# Altium PCB 00.Main.PcbDoc (part 3 of 5)
Units mm, origin at the board's own origin, x right, y up, seen from the top; angles counter-clockwise.
Board outline 300 x 165 mm, 2 copper layers (Top Layer, Bottom Layer); 76 components, 103 nets, 576 pads, 97 vias.
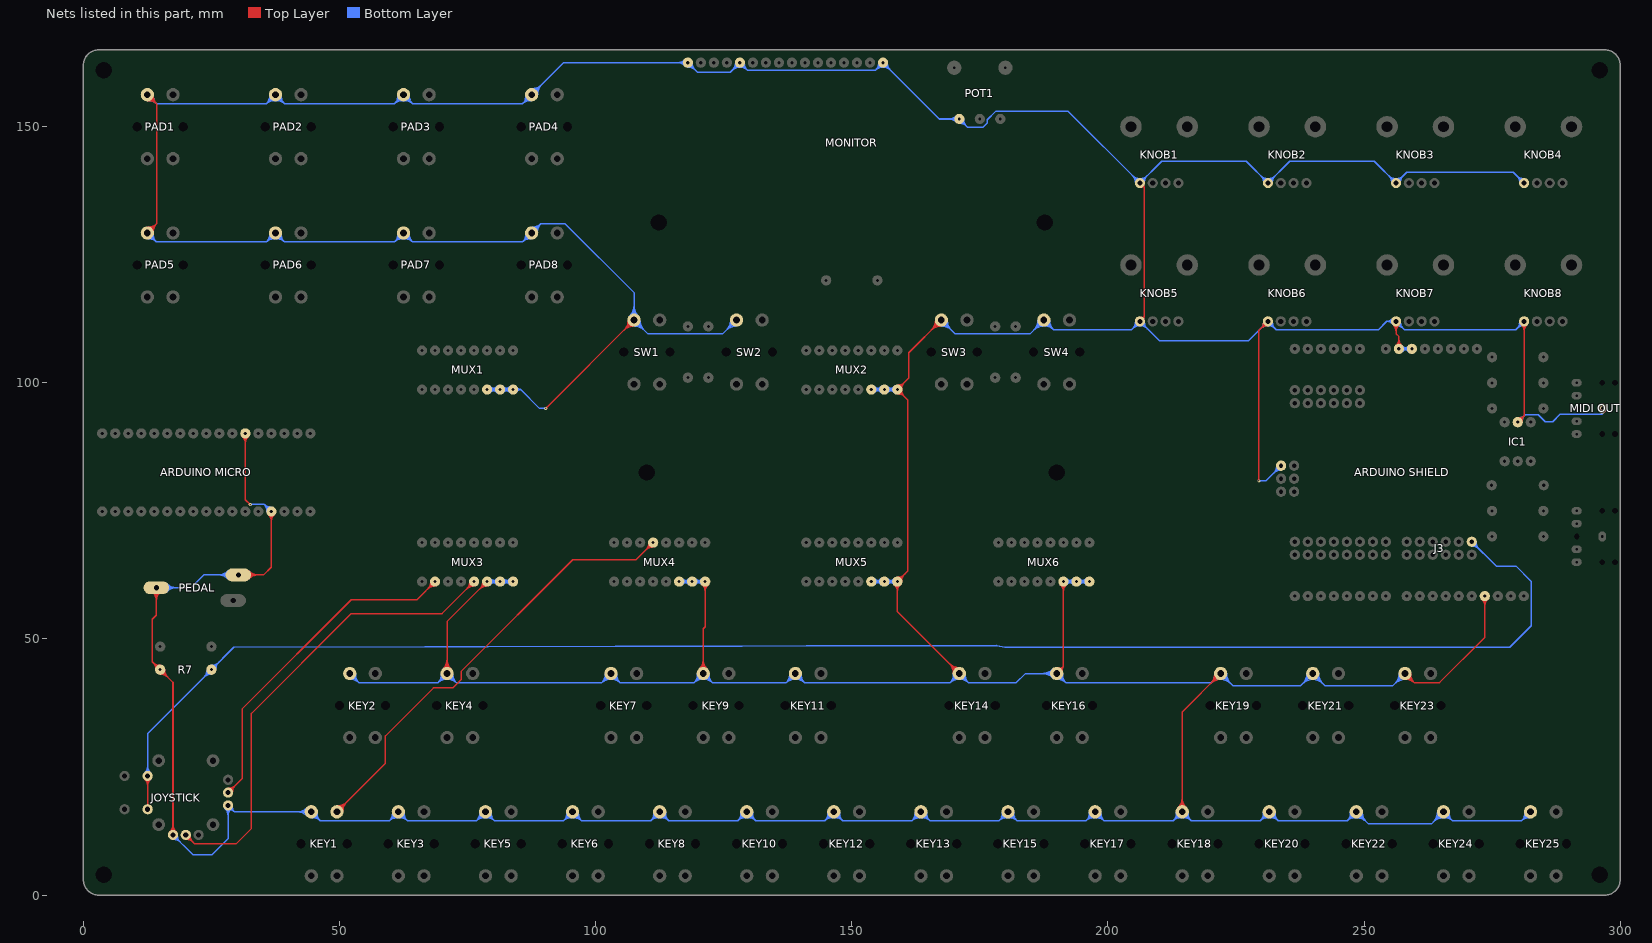
[diagram p3: the nets of this part, all layers, seen from the top]

## Via types
v1: diameter 0.6, hole 0.3, Top Layer to Bottom Layer, 97 vias

## Nets (pads, with @x,y where several pads share a name; then routed paths per layer and width w, separated by ;. In a path a pad name is that pad's centre, name@x,y a point inside that pad or via, vN(x,y) a via of type N, cw(c..) or ccw(c..) an arc to the next point about the centre after c; other vN are vias at no path point) (continued)
GND: "ARDUINO MICRO.14" "ARDUINO MICRO.23" "ARDUINO SHIELD.6" "ARDUINO SHIELD.6\"" "ARDUINO SHIELD.7" "ARDUINO SHIELD.29" "MIDI OUT.1" IC1.5 JOYSTICK.1X JOYSTICK.1Y KEY1.1 KEY2.1 KEY3.1 KEY4.1 KEY5.1 KEY6.1 KEY7.1 KEY8.1 KEY9.1 KEY10.1 KEY11.1 KEY12.1 KEY13.1 KEY14.1 KEY15.1 KEY16.1 KEY17.1 KEY18.1 KEY19.1 KEY20.1 KEY21.1 KEY22.1 KEY23.1 KEY24.1 KEY25.1 KNOB1.1 KNOB2.1 KNOB3.1 KNOB4.1 KNOB5.1 KNOB6.1 KNOB7.1 KNOB8.1 MONITOR.1 MONITOR.5 MONITOR.16 MUX1.6 MUX1.7 MUX1.8 MUX2.6 MUX2.7 MUX2.8 MUX3.6 MUX3.7 MUX3.8 MUX4.6 MUX4.7 MUX4.8 MUX5.6 MUX5.7 MUX5.8 MUX6.6 MUX6.7 MUX6.8 PAD1.1 PAD2.1 PAD3.1 PAD4.1 PAD5.1 PAD6.1 PAD7.1 PAD8.1 PEDAL.1 PEDAL.4 POT1.1 R7.2 SW1.1 SW2.1 SW3.1 SW4.1 | length 2593.4
  Top Layer w0.3: PAD5.1@12.5,129.25 14.362,131.112 ; PAD1.1@12.5,156.25 14.362,154.388 ; PAD5.1@12.532,130.099 ccw(c12.601,131.901) 13.876,130.626 ccw(c15.151,129.351) PAD5.1@13.349,129.282 ; PAD1.1@12.532,155.401 cw(c12.601,153.599) 13.876,154.874 cw(c15.151,156.149) PAD1.1@13.349,156.218 ; PAD5.1@12.544,130.399 ccw(c12.637,132.837) 14.362,131.112 ; PAD1.1@12.544,155.101 cw(c12.637,152.663) 14.362,154.388 ; PEDAL.1@13.472,59.222 cw(c11.594,57.344) 14.25,57.344 cw(c16.906,57.344) PEDAL.1@15.028,59.222 ; PAD5.1@13.649,129.294 cw(c16.087,129.387) 14.362,131.112 ; PAD1.1@13.649,156.206 ccw(c16.087,156.113) 14.362,154.388 ; PEDAL.1@13.684,59.434 cw(c12.319,58.069) 14.25,58.069 cw(c16.181,58.069) PEDAL.1@14.816,59.434 ; R7.2@14.15,44 ccw(c12.098,44) 13.549,45.451 ccw(c15,46.902) R7.2@15,44.85 ; PEDAL.1@14.25,60 14.25,54.636 13.448,53.834 13.448,45.552 R7.2@15,44 17.5,41.5 JOYSTICK.1X@17.5,11.75 ; R7.2@14.45,44 ccw(c13.122,44) 14.061,44.939 ccw(c15,45.878) R7.2@15,44.55 ; R7.2@15,43.15 cw(c15,41.098) 16.451,42.549 cw(c17.902,44) R7.2@15.85,44 ; R7.2@15,43.45 cw(c15,42.122) 15.939,43.061 cw(c16.878,44) R7.2@15.55,44 ; JOYSTICK.1X@16.899,12.351 ccw(c15.448,13.802) 17.5,13.802 ccw(c19.552,13.802) JOYSTICK.1X@18.101,12.351 ; JOYSTICK.1X@17.111,12.139 ccw(c16.172,13.078) 17.5,13.078 ccw(c18.828,13.078) JOYSTICK.1X@17.889,12.139 ; PEDAL.4@30.25,62.5 35.19,62.5 36.7,64.01 36.7,74.88 ; 31.019,89.519 cw(c29.568,88.068) 31.62,88.068 cw(c33.672,88.068) 32.221,89.519 ; 31.231,89.731 cw(c30.292,88.792) 31.62,88.792 cw(c32.948,88.792) 32.009,89.731 ; 31.62,90.12 31.62,77.191 v1(32.574,76.237) ; PEDAL.4@32.066,61.934 cw(c33.431,60.569) 33.431,62.5 cw(c33.431,64.431) PEDAL.4@32.066,63.066 ; PEDAL.4@32.278,61.722 cw(c34.156,59.844) 34.156,62.5 cw(c34.156,65.156) PEDAL.4@32.278,63.278 ; v1@32.424,76.237 ccw(c32.062,76.237) 32.318,76.493 ccw(c32.574,76.749) v1@32.574,76.387 ; 36.099,74.279 cw(c34.648,72.828) 36.7,72.828 cw(c38.752,72.828) 37.301,74.279 ; 36.311,74.491 cw(c35.372,73.552) 36.7,73.552 cw(c38.028,73.552) 37.089,74.491 ; KEY4.1@70.187,44.063 ccw(c68.224,46.026) 71,46.026 ccw(c73.776,46.026) KEY4.1@71.813,44.063 ; KEY4.1@70.399,43.851 ccw(c68.948,45.302) 71,45.302 ccw(c73.052,45.302) KEY4.1@71.601,43.851 ; KEY4.1@70.611,43.639 ccw(c69.672,44.578) 71,44.578 ccw(c72.328,44.578) KEY4.1@71.389,43.639 ; KEY4.1@71,43.25 71,53.38 MUX3.6@78.81,61.19 ; MUX3.6@77.96,61.19 cw(c75.908,61.19) 77.359,59.739 cw(c78.81,58.288) MUX3.6@78.81,60.34 ; MUX3.6@78.26,61.19 cw(c76.932,61.19) 77.871,60.251 cw(c78.81,59.312) MUX3.6@78.81,60.64 ; v1(90.257,95.007) SW1.1@107.5,112.25 ; v1@90.257,95.157 ccw(c90.257,95.52) 90.513,95.263 ccw(c90.77,95.007) v1@90.407,95.007 ; SW1.1@106.35,112.25 cw(c103.574,112.25) 105.537,110.287 cw(c107.5,108.324) SW1.1@107.5,111.1 ; SW1.1@106.65,112.25 cw(c104.598,112.25) 106.049,110.799 cw(c107.5,109.348) SW1.1@107.5,111.4 ; SW1.1@106.95,112.25 cw(c105.622,112.25) 106.561,111.311 cw(c107.5,110.372) SW1.1@107.5,111.7 ; KEY9.1@120.187,44.063 ccw(c118.224,46.026) 121,46.026 ccw(c123.776,46.026) KEY9.1@121.813,44.063 ; KEY9.1@120.399,43.851 ccw(c118.948,45.302) 121,45.302 ccw(c123.052,45.302) KEY9.1@121.601,43.851 ; KEY9.1@120.611,43.639 ccw(c119.672,44.578) 121,44.578 ccw(c122.328,44.578) KEY9.1@121.389,43.639 ; MUX4.8@120.789,60.589 cw(c119.338,59.138) 121.39,59.138 cw(c123.442,59.138) MUX4.8@121.991,60.589 ; KEY9.1@121,43.25 121,52.005 121.39,52.395 MUX4.8@121.39,61.19 ; MUX4.8@121.001,60.801 cw(c120.062,59.862) 121.39,59.862 cw(c122.718,59.862) MUX4.8@121.779,60.801 ; MUX5.8@158.289,60.589 cw(c156.838,59.138) 158.89,59.138 cw(c160.942,59.138) MUX5.8@159.491,60.589 ; MUX5.8@158.501,60.801 cw(c157.562,59.862) 158.89,59.862 cw(c160.218,59.862) MUX5.8@159.279,60.801 ; MUX5.8@158.89,61.74 ccw(c158.89,63.068) 159.829,62.129 ccw(c160.768,61.19) MUX5.8@159.44,61.19 ; MUX5.8@158.89,62.04 ccw(c158.89,64.092) 160.341,62.641 ccw(c161.792,61.19) MUX5.8@159.74,61.19 ; MUX2.8@158.89,97.84 cw(c158.89,95.788) 160.341,97.239 cw(c161.792,98.69) 159.74,98.69 cw(c161.792,98.69) 160.341,100.141 cw(c158.89,101.592) MUX2.8@158.89,99.54 ; MUX2.8@158.89,98.14 cw(c158.89,96.812) 159.829,97.751 cw(c160.768,98.69) 159.44,98.69 cw(c160.768,98.69) 159.829,99.629 cw(c158.89,100.568) MUX2.8@158.89,99.24 ; SW3.1@166.35,112.25 cw(c163.574,112.25) 165.537,110.287 cw(c167.5,108.324) SW3.1@167.5,111.1 ; SW3.1@166.65,112.25 cw(c164.598,112.25) 166.049,110.799 cw(c167.5,109.348) SW3.1@167.5,111.4 ; SW3.1@166.95,112.25 cw(c165.622,112.25) 166.561,111.311 cw(c167.5,110.372) SW3.1@167.5,111.7 ; SW3.1@167.5,112.25 161.133,105.883 161.133,100.933 MUX2.8@158.89,98.69 160.94,96.64 160.94,63.24 MUX5.8@158.89,61.19 158.89,55.36 KEY14.1@171,43.25 ; KEY14.1@169.85,43.25 ccw(c167.074,43.25) 169.037,45.213 ccw(c171,47.176) KEY14.1@171,44.4 ; KEY14.1@170.15,43.25 ccw(c168.098,43.25) 169.549,44.701 ccw(c171,46.152) KEY14.1@171,44.1 ; KEY14.1@170.45,43.25 ccw(c169.122,43.25) 170.061,44.189 ccw(c171,45.128) KEY14.1@171,43.8 ; KEY16.1@190,43.25 191.31,44.56 ; KEY16.1@190.272,44.055 ccw(c190.489,44.698) 190.968,44.218 ccw(c191.448,43.739) KEY16.1@190.805,43.522 ; KEY16.1@190.368,44.34 ccw(c190.661,45.208) 191.31,44.56 ; MUX6.6@190.709,60.589 cw(c189.258,59.138) 191.31,59.138 cw(c193.362,59.138) MUX6.6@191.911,60.589 ; MUX6.6@190.921,60.801 cw(c189.982,59.862) 191.31,59.862 cw(c192.638,59.862) MUX6.6@191.699,60.801 ; KEY16.1@191.09,43.618 cw(c191.958,43.911) 191.31,44.56 ; MUX6.6@191.31,61.19 191.31,44.56 ; KNOB5.1@206.25,112 207.072,112.822 ; KNOB1.1@206.25,139 207.072,138.178 ; KNOB5.1@206.641,112.755 ccw(c206.811,113.083) 207.072,112.822 ; KNOB1.1@206.641,138.245 cw(c206.811,137.917) 207.072,138.178 ; KNOB5.1@207.005,112.391 cw(c207.333,112.561) 207.072,112.822 ; KNOB1.1@207.005,138.609 ccw(c207.333,138.439) 207.072,138.178 ; KEY18.1@213.687,17.063 ccw(c211.724,19.026) 214.5,19.026 ccw(c217.276,19.026) KEY18.1@215.313,17.063 ; KEY18.1@213.899,16.851 ccw(c212.448,18.302) 214.5,18.302 ccw(c216.552,18.302) KEY18.1@215.101,16.851 ; KEY18.1@214.111,16.639 ccw(c213.172,17.578) 214.5,17.578 ccw(c215.828,17.578) KEY18.1@214.889,16.639 ; KEY18.1@214.5,16.25 214.5,35.75 KEY19.1@222,43.25 ; KEY19.1@220.85,43.25 cw(c218.074,43.25) 220.037,41.287 cw(c222,39.324) KEY19.1@222,42.1 ; KEY19.1@221.15,43.25 cw(c219.098,43.25) 220.549,41.799 cw(c222,40.348) KEY19.1@222,42.4 ; KEY19.1@221.45,43.25 cw(c220.122,43.25) 221.061,42.311 cw(c222,41.372) KEY19.1@222,42.7 ; v1@229.369,80.964 ccw(c229.174,81.159) 229.449,81.159 ; 229.449,81.282 ccw(c229.898,81.282) v1@229.581,80.964 ; v1(229.475,80.858) 229.449,80.884 229.449,110.199 KNOB6.1@231.25,112 ; KNOB6.1@230.4,112 cw(c228.348,112) 229.799,110.549 cw(c231.25,109.098) KNOB6.1@231.25,111.15 ; KNOB6.1@230.7,112 cw(c229.372,112) 230.311,111.061 cw(c231.25,110.122) KNOB6.1@231.25,111.45 ; KNOB7.1@255.649,111.399 cw(c254.198,109.948) 256.25,109.948 cw(c258.302,109.948) KNOB7.1@256.851,111.399 ; KNOB7.1@255.861,111.611 cw(c254.922,110.672) 256.25,110.672 cw(c257.578,110.672) KNOB7.1@256.639,111.611 ; 256.207,107.231 ccw(c254.756,108.682) 256.808,108.682 ccw(c258.86,108.682) 257.409,107.231 ; KNOB7.1@256.25,112 256.25,109.586 256.808,109.028 256.808,106.63 ; 256.419,107.019 ccw(c255.48,107.958) 256.808,107.958 ccw(c258.136,107.958) 257.197,107.019 ; KEY23.1@258,43.25 259.76,41.49 ; KEY23.1@258.068,42.403 cw(c258.193,40.841) 259.301,41.949 cw(c260.409,43.057) KEY23.1@258.847,43.182 ; KEY23.1@258.092,42.104 cw(c258.262,39.991) 259.76,41.49 ; KEY23.1@259.146,43.158 ccw(c261.259,42.988) 259.76,41.49 ; 272.971,57.769 cw(c271.52,56.318) 273.572,56.318 cw(c275.624,56.318) 274.173,57.769 ; 273.183,57.981 cw(c272.244,57.042) 273.572,57.042 cw(c274.9,57.042) 273.961,57.981 ; 273.572,58.37 273.572,50.306 264.755,41.49 259.76,41.49 ; IC1.5@280,92.31 281.25,93.56 ; IC1.5@280.061,92.857 ccw(c280.162,93.765) 280.809,93.119 ccw(c281.455,92.472) IC1.5@280.547,92.371 ; IC1.5@280.094,93.155 ccw(c280.251,94.559) 281.25,93.56 ; KNOB8.1@280.649,111.399 cw(c279.198,109.948) 281.25,109.948 cw(c283.302,109.948) KNOB8.1@281.851,111.399 ; IC1.5@280.845,92.404 cw(c282.249,92.561) 281.25,93.56 ; KNOB8.1@280.861,111.611 cw(c279.922,110.672) 281.25,110.672 cw(c282.578,110.672) KNOB8.1@281.639,111.611 ; KNOB8.1@281.25,112 281.25,93.56 ; 14.362,131.112 14.362,154.388 ; 207.072,112.822 207.072,138.178
  Bottom Layer w0.3: PAD5.1@12.5,129.25 14.256,127.494 35.744,127.494 ; PAD1.1@12.5,156.25 14.256,154.494 ; PAD5.1@12.57,128.403 cw(c12.697,126.851) 13.798,127.952 cw(c14.899,129.053) PAD5.1@13.347,129.18 ; PAD1.1@12.57,155.403 cw(c12.697,153.852) 13.798,154.952 cw(c14.898,156.053) PAD1.1@13.347,156.18 ; PAD5.1@12.594,128.104 cw(c12.767,126.005) 14.256,127.494 cw(c15.745,128.983) PAD5.1@13.646,129.156 ; PAD1.1@12.594,155.104 cw(c12.767,153.005) 14.256,154.494 ; PAD1.1@13.646,156.156 ccw(c15.744,155.983) 14.256,154.494 ; PEDAL.1@14.25,60 20.991,60 23.491,62.5 PEDAL.4@30.25,62.5 ; PEDAL.1@16.066,59.434 cw(c17.431,58.069) 17.431,60 cw(c17.431,61.931) PEDAL.1@16.066,60.566 ; PEDAL.1@16.278,59.222 cw(c18.156,57.344) 18.156,60 cw(c18.156,62.656) PEDAL.1@16.278,60.778 ; JOYSTICK.1X@17.5,10.9 cw(c17.5,8.848) 18.951,10.299 cw(c20.402,11.75) JOYSTICK.1X@18.35,11.75 ; JOYSTICK.1X@17.5,11.2 cw(c17.5,9.872) 18.439,10.811 cw(c19.378,11.75) JOYSTICK.1X@18.05,11.75 ; JOYSTICK.1X@17.5,11.75 21.39,7.86 25.098,7.86 28.25,11.012 JOYSTICK.1Y@28.25,17.5 29.5,16.25 ; JOYSTICK.1Y@27.649,16.899 cw(c26.198,15.448) 28.25,15.448 cw(c30.302,15.448) JOYSTICK.1Y@28.851,16.899 ; JOYSTICK.1Y@27.861,17.111 cw(c26.922,16.172) 28.25,16.172 cw(c29.578,16.172) JOYSTICK.1Y@28.639,17.111 ; PEDAL.4@28.222,61.722 ccw(c26.344,59.844) 26.344,62.5 ccw(c26.344,65.156) PEDAL.4@28.222,63.278 ; JOYSTICK.1Y@28.311,16.953 cw(c28.412,16.045) 29.059,16.691 cw(c29.705,17.338) JOYSTICK.1Y@28.797,17.439 ; JOYSTICK.1Y@28.344,16.655 cw(c28.501,15.251) 29.5,16.25 ; PEDAL.4@28.434,61.934 ccw(c27.069,60.569) 27.069,62.5 ccw(c27.069,64.431) PEDAL.4@28.434,63.066 ; JOYSTICK.1Y@29.095,17.406 ccw(c30.499,17.249) 29.5,16.25 ; v1(32.574,76.237) 32.667,76.33 35.25,76.33 ; v1@32.68,76.131 cw(c33.161,75.65) 33.161,76.33 ; 35.85,74.88 ccw(c33.802,74.881) 35.25,76.33 ; 36.15,74.88 ccw(c34.825,74.881) 35.762,75.818 ccw(c36.699,76.755) 36.7,75.43 ; PAD6.1@36.354,129.156 cw(c34.255,128.983) 35.744,127.494 ; PAD2.1@36.354,156.156 cw(c34.255,155.983) 35.744,154.494 ; PAD6.1@36.653,129.18 cw(c35.101,129.053) 36.202,127.952 cw(c37.303,126.851) PAD6.1@37.43,128.403 ; PAD2.1@36.653,156.18 cw(c35.102,156.053) 36.202,154.952 cw(c37.303,153.852) PAD2.1@37.43,155.403 ; 36.7,74.88 35.25,76.33 ; 36.7,75.73 cw(c36.699,77.778) 35.25,76.33 ; PAD6.1@37.406,128.104 ccw(c37.233,126.005) 35.744,127.494 ; PAD2.1@37.406,155.104 ccw(c37.233,153.005) 35.744,154.494 ; PAD6.1@37.57,128.403 cw(c37.697,126.851) 38.798,127.952 cw(c39.899,129.053) PAD6.1@38.347,129.18 ; PAD2.1@37.57,155.403 cw(c37.697,153.852) 38.798,154.952 cw(c39.898,156.053) PAD2.1@38.347,156.18 ; PAD6.1@37.594,128.104 cw(c37.767,126.005) 39.256,127.494 cw(c40.745,128.983) PAD6.1@38.646,129.156 ; PAD2.1@37.594,155.104 cw(c37.767,153.005) 39.256,154.494 ; PAD2.1@38.646,156.156 ccw(c40.744,155.983) 39.256,154.494 ; KEY1.1@43.687,15.437 ccw(c41.724,13.474) 41.724,16.25 ccw(c41.724,19.026) KEY1.1@43.687,17.063 ; KEY1.1@43.899,15.649 ccw(c42.448,14.198) 42.448,16.25 ccw(c42.448,18.302) KEY1.1@43.899,16.851 ; KEY1.1@44.111,15.861 ccw(c43.172,14.922) 43.172,16.25 ccw(c43.172,17.578) KEY1.1@44.111,16.639 ; KEY1.1@44.568,15.403 cw(c44.693,13.841) 45.801,14.949 cw(c46.909,16.057) KEY1.1@45.347,16.182 ; KEY1.1@44.592,15.104 cw(c44.761,12.99) 46.261,14.489 ; KEY1.1@45.646,16.158 ccw(c47.76,15.989) 46.261,14.489 ; KEY2.1@52,43.25 53.76,41.49 ; KEY2.1@52.068,42.403 cw(c52.193,40.841) 53.301,41.949 cw(c54.409,43.057) KEY2.1@52.847,43.182 ; KEY2.1@52.092,42.104 cw(c52.262,39.991) 53.76,41.49 ; KEY2.1@53.146,43.158 ccw(c55.259,42.988) 53.76,41.49 ; KEY3.1@60.354,16.158 cw(c58.24,15.989) 59.739,14.489 ; KEY3.1@60.653,16.182 cw(c59.091,16.057) 60.199,14.949 cw(c61.307,13.841) KEY3.1@61.432,15.403 ; PAD7.1@61.354,129.156 cw(c59.255,128.983) 60.744,127.494 ; PAD3.1@61.354,156.156 cw(c59.255,155.983) 60.744,154.494 ; KEY3.1@61.408,15.104 ccw(c61.239,12.99) 59.739,14.489 ; KEY3.1@61.568,15.403 cw(c61.693,13.841) 62.801,14.949 cw(c63.909,16.057) KEY3.1@62.347,16.182 ; KEY3.1@61.592,15.104 cw(c61.761,12.99) 63.261,14.489 ; PAD7.1@61.653,129.18 cw(c60.101,129.053) 61.202,127.952 cw(c62.303,126.851) PAD7.1@62.43,128.403 ; PAD3.1@61.653,156.18 cw(c60.102,156.053) 61.202,154.952 cw(c62.303,153.852) PAD3.1@62.43,155.403 ; PAD7.1@62.406,128.104 ccw(c62.233,126.005) 60.744,127.494 ; PAD3.1@62.406,155.104 ccw(c62.233,153.005) 60.744,154.494 ; PAD7.1@62.57,128.403 cw(c62.697,126.851) 63.798,127.952 cw(c64.899,129.053) PAD7.1@63.347,129.18 ; PAD3.1@62.57,155.403 cw(c62.697,153.852) 63.798,154.952 cw(c64.898,156.053) PAD3.1@63.347,156.18 ; PAD7.1@62.594,128.104 cw(c62.767,126.005) 64.256,127.494 ; PAD3.1@62.594,155.104 cw(c62.767,153.005) 64.256,154.494 ; KEY3.1@62.646,16.158 ccw(c64.76,15.989) 63.261,14.489 ; PAD7.1@63.646,129.156 ccw(c65.745,128.983) 64.256,127.494 ; PAD3.1@63.646,156.156 ccw(c65.744,155.983) 64.256,154.494 ; KEY4.1@69.854,43.158 cw(c67.741,42.988) 69.24,41.49 ; KEY4.1@70.153,43.182 cw(c68.591,43.057) 69.699,41.949 cw(c70.807,40.841) KEY4.1@70.932,42.403 ; KEY4.1@70.908,42.104 ccw(c70.738,39.991) 69.24,41.49 ; KEY4.1@71.068,42.403 cw(c71.193,40.841) 72.301,41.949 cw(c73.409,43.057) KEY4.1@71.847,43.182 ; KEY4.1@71.092,42.104 cw(c71.262,39.991) 72.76,41.49 ; KEY4.1@72.146,43.158 ccw(c74.259,42.988) 72.76,41.49 ; KEY5.1@77.354,16.158 cw(c75.24,15.989) 76.739,14.489 ; KEY5.1@77.653,16.182 cw(c76.091,16.057) 77.199,14.949 cw(c78.307,13.841) KEY5.1@78.432,15.403 ; KEY5.1@78.408,15.104 ccw(c78.239,12.99) 76.739,14.489 ; KEY5.1@78.568,15.403 cw(c78.693,13.841) 79.801,14.949 cw(c80.909,16.057) KEY5.1@79.347,16.182 ; KEY5.1@78.592,15.104 cw(c78.761,12.99) 80.261,14.489 ; MUX3.6@78.81,61.19 MUX3.7@81.35,61.19 MUX3.8@83.89,61.19 ; MUX1.6@78.81,98.69 MUX1.7@81.35,98.69 MUX1.8@83.89,98.69 85.375,98.69 ; MUX3.6@79.199,60.801 cw(c80.138,59.862) 80.138,61.19 cw(c80.138,62.518) MUX3.6@79.199,61.579 ; MUX1.6@79.199,98.301 cw(c80.138,97.362) 80.138,98.69 cw(c80.138,100.018) MUX1.6@79.199,99.079 ; MUX3.6@79.411,60.589 cw(c80.862,59.138) 80.862,61.19 cw(c80.862,63.242) MUX3.6@79.411,61.791 ; MUX1.6@79.411,98.089 cw(c80.862,96.638) 80.862,98.69 cw(c80.862,100.742) MUX1.6@79.411,99.291 ; KEY5.1@79.646,16.158 ccw(c81.76,15.989) 80.261,14.489 ; MUX3.7@80.539,60.937 ccw(c79.865,60.726) 80.047,61.408 ccw(c80.183,61.914) MUX3.7@80.628,61.638 ; MUX3.7@80.539,61.443 cw(c79.865,61.654) 80.047,60.972 cw(c80.183,60.466) MUX3.7@80.628,60.742 ; MUX1.7@80.539,98.437 ccw(c79.865,98.226) 80.047,98.908 ccw(c80.183,99.414) MUX1.7@80.628,99.138 ; MUX1.7@80.539,98.943 cw(c79.865,99.154) 80.047,98.472 cw(c80.183,97.966) MUX1.7@80.628,98.242 ; MUX3.7@80.749,60.589 ccw(c79.298,59.138) 79.298,61.19 ccw(c79.298,63.242) MUX3.7@80.749,61.791 ; MUX1.7@80.749,98.089 ccw(c79.298,96.638) 79.298,98.69 ccw(c79.298,100.742) MUX1.7@80.749,99.291 ; MUX3.7@80.961,60.801 ccw(c80.022,59.862) 80.022,61.19 ccw(c80.022,62.518) MUX3.7@80.961,61.579 ; MUX1.7@80.961,98.301 ccw(c80.022,97.362) 80.022,98.69 ccw(c80.022,100.018) MUX1.7@80.961,99.079 ; MUX3.7@81.739,60.801 cw(c82.678,59.862) 82.678,61.19 cw(c82.678,62.518) MUX3.7@81.739,61.579 ; MUX1.7@81.739,98.301 cw(c82.678,97.362) 82.678,98.69 cw(c82.678,100.018) MUX1.7@81.739,99.079 ; MUX3.7@81.951,60.589 cw(c83.402,59.138) 83.402,61.19 cw(c83.402,63.242) MUX3.7@81.951,61.791 ; MUX1.7@81.951,98.089 cw(c83.402,96.638) 83.402,98.69 cw(c83.402,100.742) MUX1.7@81.951,99.291 ; MUX3.8@83.079,60.937 ccw(c82.405,60.726) 82.587,61.408 ccw(c82.723,61.914) MUX3.8@83.168,61.638 ; MUX3.8@83.079,61.443 cw(c82.405,61.654) 82.587,60.972 cw(c82.723,60.466) MUX3.8@83.168,60.742 ; MUX1.8@83.079,98.437 ccw(c82.405,98.226) 82.587,98.908 ccw(c82.723,99.414) MUX1.8@83.168,99.138 ; MUX1.8@83.079,98.943 cw(c82.405,99.154) 82.587,98.472 cw(c82.723,97.966) MUX1.8@83.168,98.242 ; MUX3.8@83.289,60.589 ccw(c81.838,59.138) 81.838,61.19 ccw(c81.838,63.242) MUX3.8@83.289,61.791 ; MUX1.8@83.289,98.089 ccw(c81.838,96.638) 81.838,98.69 ccw(c81.838,100.742) MUX1.8@83.289,99.291 ; MUX3.8@83.501,60.801 ccw(c82.562,59.862) 82.562,61.19 ccw(c82.562,62.518) MUX3.8@83.501,61.579 ; MUX1.8@83.501,98.301 ccw(c82.562,97.362) 82.562,98.69 ccw(c82.562,100.018) MUX1.8@83.501,99.079 ; MUX1.8@84.623,98.26 cw(c85.374,97.819) 85.374,98.69 ; MUX1.8@84.623,99.12 ccw(c85.374,99.561) 85.374,98.69 ; PAD8.1@86.354,129.156 cw(c84.255,128.983) 85.744,127.494 ; PAD4.1@86.354,156.156 cw(c84.255,155.983) 85.744,154.494 cw(c87.233,153.005) PAD4.1@87.406,155.104 ; PAD8.1@86.653,129.18 cw(c85.101,129.053) 86.202,127.952 cw(c87.303,126.851) PAD8.1@87.43,128.403 ; PAD4.1@86.653,156.18 cw(c85.102,156.053) 86.202,154.952 cw(c87.303,153.852) PAD4.1@87.43,155.403 ; PAD8.1@87.406,128.104 ccw(c87.233,126.005) 85.744,127.494 ; PAD4.1@87.5,156.8 ccw(c87.5,158.128) 88.439,157.189 ccw(c89.378,156.25) PAD4.1@88.05,156.25 ; PAD4.1@87.5,157.1 ccw(c87.5,159.152) 88.951,157.701 ccw(c90.402,156.25) PAD4.1@88.35,156.25 ; PAD4.1@87.5,157.4 ccw(c87.5,160.176) 89.463,158.213 ccw(c91.426,156.25) PAD4.1@88.65,156.25 ; PAD8.1@87.563,130.098 ccw(c87.681,131.692) 88.812,130.562 ccw(c89.942,129.431) PAD8.1@88.348,129.313 ; PAD8.1@87.585,130.397 ccw(c87.745,132.554) 89.275,131.025 ; PAD8.1@88.647,129.335 cw(c90.804,129.495) 89.275,131.025 ; v1@90.151,94.901 ccw(c89.895,94.645) 89.895,95.007 ccw(c89.895,95.37) v1@90.151,95.113 ; v1(90.257,95.007) 89.057,95.007 85.375,98.69 ; KEY6.1@94.354,16.158 cw(c92.24,15.989) 93.739,14.489 ; KEY6.1@94.653,16.182 cw(c93.091,16.057) 94.199,14.949 cw(c95.307,13.841) KEY6.1@95.432,15.403 ; KEY6.1@95.408,15.104 ccw(c95.239,12.99) 93.739,14.489 ; KEY6.1@95.568,15.403 cw(c95.693,13.841) 96.801,14.949 cw(c97.909,16.057) KEY6.1@96.347,16.182 ; KEY6.1@95.592,15.104 cw(c95.761,12.99) 97.261,14.489 cw(c98.76,15.989) KEY6.1@96.646,16.158 ; KEY7.1@101.854,43.158 cw(c99.741,42.988) 101.24,41.49 ; KEY7.1@102.153,43.182 cw(c100.591,43.057) 101.699,41.949 cw(c102.807,40.841) KEY7.1@102.932,42.403 ; KEY7.1@102.908,42.104 ccw(c102.738,39.991) 101.24,41.49 ; KEY7.1@103.068,42.403 cw(c103.193,40.841) 104.301,41.949 cw(c105.409,43.057) KEY7.1@103.847,43.182 ; KEY7.1@103.092,42.104 cw(c103.262,39.991) 104.76,41.49 ; KEY7.1@104.146,43.158 ccw(c106.259,42.988) 104.76,41.49 ; SW1.1@106.687,113.063 ccw(c104.724,115.026) 107.5,115.026 ccw(c110.276,115.026) SW1.1@108.313,113.063 ; SW1.1@106.899,112.851 ccw(c105.448,114.302) 107.5,114.302 ccw(c109.552,114.302) SW1.1@108.101,112.851 ; SW1.1@107.111,112.639 ccw(c106.172,113.578) 107.5,113.578 ccw(c108.828,113.578) SW1.1@107.889,112.639 ; SW1.1@107.5,111.1 cw(c107.5,108.324) 109.463,110.287 cw(c111.426,112.25) SW1.1@108.65,112.25 ; SW1.1@107.5,111.4 cw(c107.5,109.348) 108.951,110.799 cw(c110.402,112.25) SW1.1@108.35,112.25 ; SW1.1@107.5,111.7 cw(c107.5,110.372) 108.439,111.311 cw(c109.378,112.25) SW1.1@108.05,112.25 ; KEY8.1@111.354,16.158 cw(c109.24,15.989) 110.739,14.489 ; KEY8.1@111.653,16.182 cw(c110.091,16.057) 111.199,14.949 cw(c112.307,13.841) KEY8.1@112.432,15.403 ; KEY8.1@112.408,15.104 ccw(c112.239,12.99) 110.739,14.489 ; KEY8.1@112.568,15.403 cw(c112.693,13.841) 113.801,14.949 cw(c114.909,16.057) KEY8.1@113.347,16.182 ; KEY8.1@112.592,15.104 cw(c112.761,12.99) 114.261,14.489 ; KEY8.1@113.646,16.158 ccw(c115.76,15.989) 114.261,14.489 ; MUX4.6@116.31,61.19 MUX4.7@118.85,61.19 MUX4.8@121.39,61.19 ; MUX4.6@116.699,60.801 cw(c117.638,59.862) 117.638,61.19 cw(c117.638,62.518) MUX4.6@116.699,61.579 ; MUX4.6@116.911,60.589 cw(c118.362,59.138) 118.362,61.19 cw(c118.362,63.242) MUX4.6@116.911,61.791 ; MUX4.6@117.032,60.742 cw(c117.477,60.466) 117.613,60.972 cw(c117.795,61.654) MUX4.6@117.121,61.443 ; MUX4.6@117.032,61.638 ccw(c117.477,61.914) 117.613,61.408 ccw(c117.795,60.726) MUX4.6@117.121,60.937 ; MONITOR.1@117.399,161.899 ccw(c115.948,160.448) 115.948,162.5 ccw(c115.948,164.552) MONITOR.1@117.399,163.101 ; MONITOR.1@117.611,162.111 ccw(c116.672,161.172) 116.672,162.5 ccw(c116.672,163.828) MONITOR.1@117.611,162.889 ; MONITOR.1@118,161.65 cw(c118,159.598) 119.451,161.049 cw(c120.902,162.5) MONITOR.1@118.85,162.5 ; MONITOR.1@118,161.95 cw(c118,160.622) 118.939,161.561 ; MUX4.7@118.249,60.589 ccw(c116.798,59.138) 116.798,61.19 ccw(c116.798,63.242) MUX4.7@118.249,61.791 ; MUX4.7@118.461,60.801 ccw(c117.522,59.862) 117.522,61.19 ccw(c117.522,62.518) MUX4.7@118.461,61.579 ; MONITOR.1@118.55,162.5 ccw(c119.878,162.5) 118.939,161.561 ; MUX4.7@119.239,60.801 cw(c120.178,59.862) 120.178,61.19 cw(c120.178,62.518) MUX4.7@119.239,61.579 ; MUX4.7@119.451,60.589 cw(c120.902,59.138) 120.902,61.19 cw(c120.902,63.242) MUX4.7@119.451,61.791 ; MUX4.7@119.572,60.742 cw(c120.017,60.466) 120.153,60.972 cw(c120.335,61.654) MUX4.7@119.661,61.443 ; MUX4.7@119.572,61.638 ccw(c120.017,61.914) 120.153,61.408 ccw(c120.335,60.726) MUX4.7@119.661,60.937 ; KEY9.1@119.854,43.158 cw(c117.741,42.988) 119.24,41.49 ; KEY9.1@120.153,43.182 cw(c118.591,43.057) 119.699,41.949 cw(c120.807,40.841) KEY9.1@120.932,42.403 ; MUX4.8@120.789,60.589 ccw(c119.338,59.138) 119.338,61.19 ccw(c119.338,63.242) MUX4.8@120.789,61.791 ; KEY9.1@120.908,42.104 ccw(c120.738,39.991) 119.24,41.49 ; MUX4.8@121.001,60.801 ccw(c120.062,59.862) 120.062,61.19 ccw(c120.062,62.518) MUX4.8@121.001,61.579 ; KEY9.1@121.068,42.403 cw(c121.193,40.841) 122.301,41.949 cw(c123.409,43.057) KEY9.1@121.847,43.182 ; KEY9.1@121.092,42.104 cw(c121.262,39.991) 122.76,41.49 ; KEY9.1@122.146,43.158 ccw(c124.259,42.988) 122.76,41.49 ; SW2.1@126.35,112.25 cw(c123.574,112.25) 125.537,110.287 cw(c127.5,108.324) SW2.1@127.5,111.1 ; SW2.1@126.65,112.25 cw(c124.598,112.25) 126.049,110.799 cw(c127.5,109.348) SW2.1@127.5,111.4 ; SW2.1@126.95,112.25 cw(c125.622,112.25) 126.561,111.311 cw(c127.5,110.372) SW2.1@127.5,111.7 ; 127.221,161.561 cw(c128.16,160.622) 128.16,161.95 cw(c128.16,160.622) 129.099,161.561 ; 127.221,161.561 ccw(c126.282,162.5) MONITOR.5@127.61,162.5 ; MONITOR.5@127.31,162.5 cw(c125.258,162.5) 126.709,161.049 cw(c128.16,159.598) 128.16,161.65 cw(c128.16,159.598) 129.611,161.049 cw(c131.062,162.5) MONITOR.5@129.01,162.5 ; SW2.1@127.5,112.25 124.786,109.536 110.214,109.536 SW1.1@107.5,112.25 107.5,117.613 94.089,131.025 89.275,131.025 ; KEY10.1@128.354,16.158 cw(c126.24,15.989) 127.739,14.489 ; KEY10.1@128.653,16.182 cw(c127.091,16.057) 128.199,14.949 cw(c129.307,13.841) KEY10.1@129.432,15.403 ; MONITOR.5@128.71,162.5 ccw(c130.038,162.5) 129.099,161.561 ; KEY10.1@129.408,15.104 ccw(c129.239,12.99) 127.739,14.489 ; KEY10.1@129.568,15.403 cw(c129.693,13.841) 130.801,14.949 cw(c131.909,16.057) KEY10.1@130.347,16.182 ; KEY10.1@129.592,15.104 cw(c129.761,12.99) 131.261,14.489 ; KEY10.1@130.646,16.158 ccw(c132.76,15.989) 131.261,14.489 ; KEY11.1@137.854,43.158 cw(c135.741,42.988) 137.24,41.49 ; KEY11.1@138.153,43.182 cw(c136.591,43.057) 137.699,41.949 cw(c138.807,40.841) KEY11.1@138.932,42.403 ; KEY11.1@138.908,42.104 ccw(c138.738,39.991) 137.24,41.49 ; KEY11.1@139.068,42.403 cw(c139.193,40.841) 140.301,41.949 cw(c141.409,43.057) KEY11.1@139.847,43.182 ; KEY11.1@139.092,42.104 cw(c139.262,39.991) 140.76,41.49 ; KEY11.1@140.146,43.158 ccw(c142.259,42.988) 140.76,41.49 ; KEY12.1@145.354,16.158 cw(c143.24,15.989) 144.739,14.489 ; KEY12.1@145.653,16.182 cw(c144.091,16.057) 145.199,14.949 cw(c146.307,13.841) KEY12.1@146.432,15.403 ; KEY12.1@146.408,15.104 ccw(c146.239,12.99) 144.739,14.489 ; KEY12.1@146.568,15.403 cw(c146.693,13.841) 147.801,14.949 cw(c148.909,16.057) KEY12.1@147.347,16.182 ; KEY12.1@146.592,15.104 cw(c146.761,12.99) 148.261,14.489 ; KEY12.1@147.646,16.158 ccw(c149.76,15.989) 148.261,14.489 ; MUX5.6@153.81,61.19 MUX5.7@156.35,61.19 MUX5.8@158.89,61.19 ; MUX2.6@153.81,98.69 MUX2.7@156.35,98.69 MUX2.8@158.89,98.69 ; MUX5.6@154.199,60.801 cw(c155.138,59.862) 155.138,61.19 cw(c155.138,62.518) MUX5.6@154.199,61.579 ; MUX2.6@154.199,98.301 cw(c155.138,97.362) 155.138,98.69 cw(c155.138,100.018) MUX2.6@154.199,99.079 ; MUX5.6@154.411,60.589 cw(c155.862,59.138) 155.862,61.19 cw(c155.862,63.242) MUX5.6@154.411,61.791 ; MUX2.6@154.411,98.089 cw(c155.862,96.638) 155.862,98.69 cw(c155.862,100.742) MUX2.6@154.411,99.291 ; MUX2.6@154.532,98.242 cw(c154.977,97.966) 155.113,98.472 cw(c155.295,99.154) MUX2.6@154.621,98.943 ; MUX2.6@154.532,99.138 ccw(c154.977,99.414) 155.113,98.908 ccw(c155.295,98.226) MUX2.6@154.621,98.437 ; 155.161,161.561 cw(c156.1,160.622) 156.1,161.95 cw(c156.1,160.622) 157.039,161.561 ; 155.161,161.561 ccw(c154.222,162.5) MONITOR.16@155.55,162.5 ; MONITOR.16@155.25,162.5 cw(c153.198,162.5) 154.649,161.049 cw(c156.1,159.598) 156.1,161.65 cw(c156.1,159.598) 157.551,161.049 cw(c159.002,162.5) MONITOR.16@156.95,162.5 ; MUX5.7@155.539,60.937 ccw(c154.865,60.726) 155.047,61.408 ccw(c155.183,61.914) MUX5.7@155.628,61.638 ; MUX5.7@155.539,61.443 cw(c154.865,61.654) 155.047,60.972 cw(c155.183,60.466) MUX5.7@155.628,60.742 ; MUX5.7@155.749,60.589 ccw(c154.298,59.138) 154.298,61.19 ccw(c154.298,63.242) MUX5.7@155.749,61.791 ; MUX2.7@155.749,98.089 ccw(c154.298,96.638) 154.298,98.69 ccw(c154.298,100.742) MUX2.7@155.749,99.291 ; MUX5.7@155.961,60.801 ccw(c155.022,59.862) 155.022,61.19 ccw(c155.022,62.518) MUX5.7@155.961,61.579 ; MUX2.7@155.961,98.301 ccw(c155.022,97.362) 155.022,98.69 ccw(c155.022,100.018) MUX2.7@155.961,99.079 ; MONITOR.16@156.65,162.5 ccw(c157.978,162.5) 157.039,161.561 ; MUX5.7@156.739,60.801 cw(c157.678,59.862) 157.678,61.19 cw(c157.678,62.518) MUX5.7@156.739,61.579 ; MUX2.7@156.739,98.301 cw(c157.678,97.362) 157.678,98.69 cw(c157.678,100.018) MUX2.7@156.739,99.079 ; MUX5.7@156.951,60.589 cw(c158.402,59.138) 158.402,61.19 cw(c158.402,63.242) MUX5.7@156.951,61.791 ; MUX2.7@156.951,98.089 cw(c158.402,96.638) 158.402,98.69 cw(c158.402,100.742) MUX2.7@156.951,99.291 ; MUX2.7@157.072,98.242 cw(c157.517,97.966) 157.653,98.472 cw(c157.835,99.154) MUX2.7@157.161,98.943 ; MUX2.7@157.072,99.138 ccw(c157.517,99.414) 157.653,98.908 ccw(c157.835,98.226) MUX2.7@157.161,98.437 ; MUX5.8@158.079,60.937 ccw(c157.405,60.726) 157.587,61.408 ccw(c157.723,61.914) MUX5.8@158.168,61.638 ; MUX5.8@158.079,61.443 cw(c157.405,61.654) 157.587,60.972 cw(c157.723,60.466) MUX5.8@158.168,60.742 ; MUX5.8@158.289,60.589 ccw(c156.838,59.138) 156.838,61.19 ccw(c156.838,63.242) MUX5.8@158.289,61.791 ; MUX2.8@158.289,98.089 ccw(c156.838,96.638) 156.838,98.69 ccw(c156.838,100.742) MUX2.8@158.289,99.291 ; MUX5.8@158.501,60.801 ccw(c157.562,59.862) 157.562,61.19 ccw(c157.562,62.518) MUX5.8@158.501,61.579 ; MUX2.8@158.501,98.301 ccw(c157.562,97.362) 157.562,98.69 ccw(c157.562,100.018) MUX2.8@158.501,99.079 ; KEY13.1@162.354,16.158 cw(c160.24,15.989) 161.739,14.489 ; KEY13.1@162.653,16.182 cw(c161.091,16.057) 162.199,14.949 cw(c163.307,13.841) KEY13.1@163.432,15.403 ; KEY13.1@163.408,15.104 ccw(c163.239,12.99) 161.739,14.489 ; KEY13.1@163.568,15.403 cw(c163.693,13.841) 164.801,14.949 cw(c165.909,16.057) KEY13.1@164.347,16.182 ; KEY13.1@163.592,15.104 cw(c163.761,12.99) 165.261,14.489 ; KEY13.1@164.646,16.158 ccw(c166.76,15.989) 165.261,14.489 ; SW3.1@167.5,111.1 cw(c167.5,108.324) 169.463,110.287 cw(c171.426,112.25) SW3.1@168.65,112.25 ; SW3.1@167.5,111.4 cw(c167.5,109.348) 168.951,110.799 cw(c170.402,112.25) SW3.1@168.35,112.25 ; SW3.1@167.5,111.7 cw(c167.5,110.372) 168.439,111.311 cw(c169.378,112.25) SW3.1@168.05,112.25 ; SW3.1@167.5,112.25 170.214,109.536 184.786,109.536 SW4.1@187.5,112.25 189.376,110.374 ; KEY14.1@169.854,43.158 cw(c167.741,42.988) 169.24,41.49 ; KEY14.1@170.153,43.182 cw(c168.591,43.057) 169.699,41.949 cw(c170.807,40.841) KEY14.1@170.932,42.403 ; POT1.1@170.399,150.899 ccw(c168.948,149.448) 168.948,151.5 ccw(c168.948,153.552) POT1.1@170.399,152.101 ; POT1.1@170.611,151.111 ccw(c169.672,150.172) 169.672,151.5 ccw(c169.672,152.828) POT1.1@170.611,151.889 ; KEY14.1@170.908,42.104 ccw(c170.738,39.991) 169.24,41.49 ; POT1.1@171,150.65 cw(c171,148.598) 172.451,150.049 cw(c173.902,151.5) POT1.1@171.85,151.5 ; POT1.1@171,150.95 cw(c171,149.622) 171.939,150.561 cw(c172.878,151.5) POT1.1@171.55,151.5 ; KEY14.1@171.068,42.403 cw(c171.193,40.841) 172.301,41.949 cw(c173.409,43.057) KEY14.1@171.847,43.182 ; KEY14.1@171.092,42.104 cw(c171.262,39.991) 172.76,41.49 ; KEY14.1@172.146,43.158 ccw(c174.259,42.988) 172.76,41.49 ; KEY15.1@179.354,16.158 cw(c177.24,15.989) 178.739,14.489 ; KEY15.1@179.653,16.182 cw(c178.091,16.057) 179.199,14.949 cw(c180.307,13.841) KEY15.1@180.432,15.403 ; KEY15.1@180.408,15.104 ccw(c180.239,12.99) 178.739,14.489 ; KEY15.1@180.568,15.403 cw(c180.693,13.841) 181.801,14.949 cw(c182.909,16.057) KEY15.1@181.347,16.182 ; KEY15.1@180.592,15.104 cw(c180.761,12.99) 182.261,14.489 ; KEY15.1@181.646,16.158 ccw(c183.76,15.989) 182.261,14.489 ; SW4.1@186.35,112.25 cw(c183.574,112.25) 185.537,110.287 cw(c187.5,108.324) SW4.1@187.5,111.1 ; SW4.1@186.65,112.25 cw(c184.598,112.25) 186.049,110.799 cw(c187.5,109.348) SW4.1@187.5,111.4 ; SW4.1@186.95,112.25 cw(c185.622,112.25) 186.561,111.311 cw(c187.5,110.372) SW4.1@187.5,111.7 ; SW4.1@187.528,111.4 cw(c187.588,109.566) 188.886,110.864 cw(c190.184,112.162) SW4.1@188.35,112.222 ; SW4.1@187.538,111.101 cw(c187.619,108.618) 189.375,110.374 ; SW4.1@188.649,112.212 ccw(c191.132,112.131) 189.375,110.374 ; KEY16.1@189.187,42.437 ccw(c187.224,40.474) 187.224,43.25 ccw(c187.224,46.026) KEY16.1@189.187,44.063 ; KEY16.1@189.399,42.649 ccw(c187.948,41.198) 187.948,43.25 ccw(c187.948,45.302) KEY16.1@189.399,43.851 ; KEY16.1@189.611,42.861 ccw(c188.672,41.922) 188.672,43.25 ccw(c188.672,44.578) KEY16.1@189.611,43.639 ; KEY16.1@190.068,42.403 cw(c190.193,40.841) 191.301,41.949 cw(c192.409,43.057) KEY16.1@190.847,43.182 ; KEY16.1@190.092,42.104 cw(c190.262,39.991) 191.76,41.49 ; KEY16.1@191.146,43.158 ccw(c193.259,42.988) 191.76,41.49 ; MUX6.6@191.31,61.19 MUX6.7@193.85,61.19 MUX6.8@196.39,61.19 ; MUX6.6@191.699,60.801 cw(c192.638,59.862) 192.638,61.19 cw(c192.638,62.518) MUX6.6@191.699,61.579 ; MUX6.6@191.911,60.589 cw(c193.362,59.138) 193.362,61.19 cw(c193.362,63.242) MUX6.6@191.911,61.791 ; MUX6.6@192.032,60.742 cw(c192.477,60.466) 192.613,60.972 cw(c192.795,61.654) MUX6.6@192.121,61.443 ; MUX6.6@192.032,61.638 ccw(c192.477,61.914) 192.613,61.408 ccw(c192.795,60.726) MUX6.6@192.121,60.937 ; MUX6.7@193.249,60.589 ccw(c191.798,59.138) 191.798,61.19 ccw(c191.798,63.242) MUX6.7@193.249,61.791 ; MUX6.7@193.461,60.801 ccw(c192.522,59.862) 192.522,61.19 ccw(c192.522,62.518) MUX6.7@193.461,61.579 ; MUX6.7@194.239,60.801 cw(c195.178,59.862) 195.178,61.19 cw(c195.178,62.518) MUX6.7@194.239,61.579 ; MUX6.7@194.451,60.589 cw(c195.902,59.138) 195.902,61.19 cw(c195.902,63.242) MUX6.7@194.451,61.791 ; MUX6.7@194.572,60.742 cw(c195.017,60.466) 195.153,60.972 cw(c195.335,61.654) MUX6.7@194.661,61.443 ; MUX6.7@194.572,61.638 ccw(c195.017,61.914) 195.153,61.408 ccw(c195.335,60.726) MUX6.7@194.661,60.937 ; MUX6.8@195.789,60.589 ccw(c194.338,59.138) 194.338,61.19 ccw(c194.338,63.242) MUX6.8@195.789,61.791 ; MUX6.8@196.001,60.801 ccw(c195.062,59.862) 195.062,61.19 ccw(c195.062,62.518) MUX6.8@196.001,61.579 ; KEY17.1@196.354,16.158 cw(c194.24,15.989) 195.739,14.489 ; KEY17.1@196.653,16.182 cw(c195.091,16.057) 196.199,14.949 cw(c197.307,13.841) KEY17.1@197.432,15.403 ; KEY17.1@197.408,15.104 ccw(c197.239,12.99) 195.739,14.489 ; KEY17.1@197.568,15.403 cw(c197.693,13.841) 198.801,14.949 cw(c199.909,16.057) KEY17.1@198.347,16.182 ; KEY17.1@197.592,15.104 cw(c197.761,12.99) 199.261,14.489 ; KEY17.1@198.646,16.158 ccw(c200.76,15.989) 199.261,14.489 ; KNOB5.1@205.4,112 cw(c203.348,112) 204.799,110.549 cw(c206.25,109.098) 206.25,111.15 cw(c206.25,109.098) 207.701,110.549 cw(c209.152,112) KNOB5.1@207.1,112 ; KNOB1.1@205.4,139 ccw(c203.348,139) 204.799,140.451 ccw(c206.25,141.902) 206.25,139.85 ccw(c206.25,141.902) 207.701,140.451 ccw(c209.152,139) KNOB1.1@207.1,139 ; KNOB5.1@205.7,112 cw(c204.372,112) 205.311,111.061 cw(c206.25,110.122) 206.25,111.45 cw(c206.25,110.122) 207.189,111.061 cw(c208.128,112) KNOB5.1@206.8,112 ; KNOB1.1@205.7,139 ccw(c204.372,139) 205.311,139.939 ccw(c206.25,140.878) 206.25,139.55 ccw(c206.25,140.878) 207.189,139.939 ccw(c208.128,139) KNOB1.1@206.8,139 ; KEY18.1@213.354,16.158 cw(c211.24,15.989) 212.739,14.489 ; KEY18.1@213.653,16.182 cw(c212.091,16.057) 213.199,14.949 cw(c214.307,13.841) KEY18.1@214.432,15.403 ; KEY18.1@214.408,15.104 ccw(c214.239,12.99) 212.739,14.489 ; KEY18.1@214.568,15.403 cw(c214.693,13.841) 215.801,14.949 cw(c216.909,16.057) KEY18.1@215.347,16.182 ; KEY18.1@214.592,15.104 cw(c214.761,12.99) 216.261,14.489 ; KEY18.1@215.646,16.158 ccw(c217.76,15.989) 216.261,14.489 ; KEY19.1@220.854,43.158 cw(c218.741,42.988) 220.24,41.49 ; KEY19.1@221.153,43.182 cw(c219.591,43.057) 220.699,41.949 cw(c221.807,40.841) KEY19.1@221.932,42.403 ; KEY19.1@221.908,42.104 ccw(c221.738,39.991) 220.24,41.49 ; KEY19.1@222,42.1 cw(c222,39.324) 223.963,41.287 cw(c225.926,43.25) KEY19.1@223.15,43.25 ; KEY19.1@222,42.4 cw(c222,40.348) 223.451,41.799 cw(c224.902,43.25) KEY19.1@222.85,43.25 ; KEY19.1@222,42.7 cw(c222,41.372) 222.939,42.311 cw(c223.878,43.25) KEY19.1@222.55,43.25 ; v1(229.475,80.858) 230.846,80.858 233.808,83.82 ; v1@229.581,80.752 cw(c229.837,80.496) 229.837,80.858 cw(c229.837,81.22) v1@229.581,80.964 ; KEY20.1@230.354,16.158 cw(c228.24,15.989) 229.739,14.489 cw(c231.239,12.99) KEY20.1@231.408,15.104 ; KNOB6.1@230.4,112 cw(c228.348,112) 229.799,110.549 cw(c231.25,109.098) 231.25,111.15 cw(c231.25,109.098) 232.701,110.549 cw(c234.152,112) KNOB6.1@232.1,112 ; KNOB2.1@230.4,139 ccw(c228.348,139) 229.799,140.451 ccw(c231.25,141.902) 231.25,139.85 ccw(c231.25,141.902) 232.701,140.451 ccw(c234.152,139) KNOB2.1@232.1,139 ; KEY20.1@230.653,16.182 cw(c229.091,16.057) 230.199,14.949 cw(c231.307,13.841) KEY20.1@231.432,15.403 ; KNOB6.1@230.7,112 cw(c229.372,112) 230.311,111.061 cw(c231.25,110.122) 231.25,111.45 cw(c231.25,110.122) 232.189,111.061 cw(c233.128,112) KNOB6.1@231.8,112 ; KNOB2.1@230.7,139 ccw(c229.372,139) 230.311,139.939 ccw(c231.25,140.878) 231.25,139.55 ccw(c231.25,140.878) 232.189,139.939 ccw(c233.128,139) KNOB2.1@231.8,139 ; KEY20.1@231.568,15.403 cw(c231.693,13.841) 232.801,14.949 cw(c233.909,16.057) KEY20.1@232.347,16.182 ; KEY20.1@231.592,15.104 cw(c231.761,12.99) 233.261,14.489 ; KEY20.1@232.646,16.158 ccw(c234.76,15.989) 233.261,14.489 ; 232.958,83.82 cw(c230.906,83.82) 232.357,82.369 cw(c233.808,80.918) 233.808,82.97 ; 233.258,83.82 cw(c231.93,83.82) 232.869,82.881 cw(c233.808,81.942) 233.808,83.27 ; KEY21.1@238.85,43.25 cw(c236.074,43.25) 238.037,41.287 cw(c240,39.324) 240,42.1 cw(c240,39.324) 241.963,41.287 cw(c243.926,43.25) KEY21.1@241.15,43.25 ; KEY21.1@239.15,43.25 cw(c237.098,43.25) 238.549,41.799 cw(c240,40.348) 240,42.4 cw(c240,40.348) 241.451,41.799 cw(c242.902,43.25) KEY21.1@240.85,43.25 ; KEY21.1@239.45,43.25 cw(c238.122,43.25) 239.061,42.311 cw(c240,41.372) 240,42.7 cw(c240,41.372) 240.939,42.311 cw(c241.878,43.25) KEY21.1@240.55,43.25 ; KEY22.1@247.354,16.158 cw(c245.24,15.989) 246.739,14.489 ; KEY22.1@247.653,16.182 cw(c246.091,16.057) 247.199,14.949 cw(c248.307,13.841) KEY22.1@248.432,15.403 ; KEY22.1@248.408,15.104 ccw(c248.239,12.99) 246.739,14.489 ; KEY22.1@248.5,15.1 cw(c248.5,12.324) 250.463,14.287 cw(c252.426,16.25) KEY22.1@249.65,16.25 ; KEY22.1@248.5,15.4 cw(c248.5,13.348) 249.951,14.799 cw(c251.402,16.25) KEY22.1@249.35,16.25 ; KEY22.1@248.5,15.7 cw(c248.5,14.372) 249.439,15.311 cw(c250.378,16.25) KEY22.1@249.05,16.25 ; KNOB3.1@255.4,139 ccw(c253.348,139) 254.799,140.451 ccw(c256.25,141.902) 256.25,139.85 ccw(c256.25,141.902) 257.701,140.451 ccw(c259.152,139) KNOB3.1@257.1,139 ; KNOB7.1@255.598,111.455 ccw(c254.431,110.478) 254.431,112 ; KNOB7.1@255.598,112.545 cw(c254.431,113.522) 254.431,112 ; KNOB3.1@255.7,139 ccw(c254.372,139) 255.311,139.939 ccw(c256.25,140.878) 256.25,139.55 ccw(c256.25,140.878) 257.189,139.939 ccw(c258.128,139) KNOB3.1@256.8,139 ; KNOB7.1@255.828,111.647 ccw(c255.073,111.015) 255.073,112 ccw(c255.073,112.985) KNOB7.1@255.828,112.353 ; KNOB7.1@256.25,111.15 cw(c256.25,109.098) 257.701,110.549 cw(c259.152,112) KNOB7.1@257.1,112 ; KNOB7.1@256.25,111.45 cw(c256.25,110.122) 257.189,111.061 cw(c258.128,112) KNOB7.1@256.8,112 ; 256.808,106.63 259.348,106.63 ; KEY23.1@256.85,43.25 cw(c254.074,43.25) 256.037,41.287 cw(c258,39.324) KEY23.1@258,42.1 ; KEY23.1@257.15,43.25 cw(c255.098,43.25) 256.549,41.799 cw(c258,40.348) KEY23.1@258,42.4 ; 257.197,106.241 cw(c258.136,105.302) 258.136,106.63 cw(c258.136,107.958) 257.197,107.019 ; 257.409,106.029 cw(c258.86,104.578) 258.86,106.63 cw(c258.86,108.682) 257.409,107.231 ; KEY23.1@257.45,43.25 cw(c256.122,43.25) 257.061,42.311 cw(c258,41.372) KEY23.1@258,42.7 ; 257.53,106.182 cw(c257.975,105.906) 258.111,106.412 cw(c258.293,107.094) 257.619,106.883 ; 257.53,107.078 ccw(c257.975,107.354) 258.111,106.848 ccw(c258.293,106.166) 257.619,106.377 ; KEY23.1@258,43.25 255.65,40.9 242.35,40.9 KEY21.1@240,43.25 237.65,40.9 224.35,40.9 KEY19.1@222,43.25 220.24,41.49 ; 258.747,106.029 ccw(c257.296,104.578) 257.296,106.63 ccw(c257.296,108.682) 258.747,107.231 ; 258.959,106.241 ccw(c258.02,105.302) 258.02,106.63 ccw(c258.02,107.958) 258.959,107.019 ; KEY24.1@264.35,16.25 cw(c261.574,16.25) 263.537,14.287 cw(c265.5,12.324) KEY24.1@265.5,15.1 ; KEY24.1@264.65,16.25 cw(c262.598,16.25) 264.049,14.799 cw(c265.5,13.348) KEY24.1@265.5,15.4 ; KEY24.1@264.95,16.25 cw(c263.622,16.25) 264.561,15.311 cw(c265.5,14.372) KEY24.1@265.5,15.7 ; KEY24.1@265.568,15.403 cw(c265.693,13.841) 266.801,14.949 cw(c267.909,16.057) KEY24.1@266.347,16.182 ; KEY24.1@265.592,15.104 cw(c265.761,12.99) 267.261,14.489 ; KEY24.1@266.646,16.158 ccw(c268.76,15.989) 267.261,14.489 ; IC1.5@280,92.31 281.453,93.763 284.008,93.763 285.355,92.417 286.828,92.417 288.25,93.839 296.5,93.839 ; IC1.5@280,92.86 ccw(c280,94.188) 280.939,93.249 ccw(c281.878,92.31) IC1.5@280.55,92.31 ; IC1.5@280,93.16 ccw(c280,95.212) 281.451,93.761 ccw(c282.902,92.31) IC1.5@280.85,92.31 ; KNOB8.1@280.4,112 cw(c278.348,112) 279.799,110.549 cw(c281.25,109.098) KNOB8.1@281.25,111.15 ; KNOB4.1@280.4,139 ccw(c278.348,139) 279.799,140.451 ccw(c281.25,141.902) KNOB4.1@281.25,139.85 ; KNOB8.1@280.7,112 cw(c279.372,112) 280.311,111.061 cw(c281.25,110.122) KNOB8.1@281.25,111.45 ; KNOB4.1@280.7,139 ccw(c279.372,139) 280.311,139.939 ccw(c281.25,140.878) KNOB4.1@281.25,139.55 ; KNOB8.1@281.25,112 279.624,110.374 257.876,110.374 KNOB7.1@256.25,112 254.431,112 ; KNOB4.1@281.25,139 279.142,141.108 258.358,141.108 KNOB3.1@256.25,139 251.983,143.267 235.517,143.267 KNOB2.1@231.25,139 227.008,143.242 210.492,143.242 KNOB1.1@206.25,139 192.28,152.97 178.065,152.97 176.465,151.37 176.465,150.735 175.627,149.897 172.603,149.897 171,151.5 167.1,151.5 MONITOR.16@156.1,162.5 154.647,161.047 129.613,161.047 MONITOR.5@128.16,162.5 126.271,160.611 119.889,160.611 MONITOR.1@118,162.5 93.75,162.5 PAD4.1@87.5,156.25 85.744,154.494 64.256,154.494 ; KEY25.1@281.354,16.158 cw(c279.24,15.989) 280.739,14.489 ; KEY25.1@281.653,16.182 cw(c280.091,16.057) 281.199,14.949 cw(c282.307,13.841) KEY25.1@282.432,15.403 ; KEY25.1@282.408,15.104 ccw(c282.239,12.99) 280.739,14.489 ; KEY25.1@282.5,16.25 280.739,14.489 ; 296.263,94.199 cw(c296.108,93.839) 296.5,93.839 ; 296.5,95 296.5,93.839 ; 296.737,94.199 ccw(c296.892,93.839) 296.5,93.839 ; 14.256,154.494 35.744,154.494 ; 29.5,16.25 KEY1.1@44.5,16.25 46.261,14.489 ; 35.744,127.494 PAD6.1@37.5,129.25 39.256,127.494 60.744,127.494 ; 35.744,154.494 PAD2.1@37.5,156.25 39.256,154.494 ; 39.256,154.494 60.744,154.494 ; 46.261,14.489 59.739,14.489 ; 53.76,41.49 69.24,41.49 ; 59.739,14.489 KEY3.1@61.5,16.25 63.261,14.489 ; 60.744,127.494 PAD7.1@62.5,129.25 64.256,127.494 ; 60.744,154.494 PAD3.1@62.5,156.25 64.256,154.494 ; 63.261,14.489 76.739,14.489 ; 64.256,127.494 85.744,127.494 ; 69.24,41.49 KEY4.1@71,43.25 72.76,41.49 ; 72.76,41.49 101.24,41.49 ; 76.739,14.489 KEY5.1@78.5,16.25 80.261,14.489 ; 80.261,14.489 93.739,14.489 ; 85.744,127.494 PAD8.1@87.5,129.25 89.275,131.025 ; 93.739,14.489 KEY6.1@95.5,16.25 97.261,14.489 110.739,14.489 ; 101.24,41.49 KEY7.1@103,43.25 104.76,41.49 ; 104.76,41.49 119.24,41.49 ; 110.739,14.489 KEY8.1@112.5,16.25 114.261,14.489 ; 114.261,14.489 127.739,14.489 ; 119.24,41.49 KEY9.1@121,43.25 122.76,41.49 ; 122.76,41.49 137.24,41.49 ; 127.739,14.489 KEY10.1@129.5,16.25 131.261,14.489 ; 131.261,14.489 144.739,14.489 ; 137.24,41.49 KEY11.1@139,43.25 140.76,41.49 ; 140.76,41.49 169.24,41.49 ; 144.739,14.489 KEY12.1@146.5,16.25 148.261,14.489 ; 148.261,14.489 161.739,14.489 ; 161.739,14.489 KEY13.1@163.5,16.25 165.261,14.489 ; 165.261,14.489 178.739,14.489 ; 169.24,41.49 KEY14.1@171,43.25 172.76,41.49 ; 172.76,41.49 182.129,41.49 183.889,43.25 KEY16.1@190,43.25 191.76,41.49 ; 178.739,14.489 KEY15.1@180.5,16.25 182.261,14.489 ; 182.261,14.489 195.739,14.489 ; 189.376,110.374 204.624,110.374 KNOB5.1@206.25,112 210.06,108.19 227.44,108.19 KNOB6.1@231.25,112 232.876,110.374 252.805,110.374 254.431,112 ; 191.76,41.49 220.24,41.49 ; 195.739,14.489 KEY17.1@197.5,16.25 199.261,14.489 ; 199.261,14.489 212.739,14.489 ; 212.739,14.489 KEY18.1@214.5,16.25 216.261,14.489 ; 216.261,14.489 229.739,14.489 KEY20.1@231.5,16.25 233.261,14.489 ; 233.261,14.489 246.739,14.489 ; 246.739,14.489 KEY22.1@248.5,16.25 250.85,13.9 263.15,13.9 KEY24.1@265.5,16.25 267.261,14.489 ; 267.261,14.489 280.739,14.489
JOY_SW: J3.12 JOYSTICK.5 R7.1 | length 343.7
  Top Layer w0.3: JOYSTICK.5@11.949,22.649 cw(c10.498,21.198) 12.55,21.198 cw(c14.602,21.198) JOYSTICK.5@13.151,22.649 ; JOYSTICK.5@12.161,22.861 cw(c11.222,21.922) 12.55,21.922 cw(c13.878,21.922) JOYSTICK.5@12.939,22.861 ; JOYSTICK.5@12.55,16.75 JOYSTICK.5@12.55,23.25
  Bottom Layer w0.3: JOYSTICK.5@11.949,23.851 ccw(c10.498,25.302) 12.55,25.302 ccw(c14.602,25.302) JOYSTICK.5@13.151,23.851 ; JOYSTICK.5@12.161,23.639 ccw(c11.222,24.578) 12.55,24.578 ccw(c13.878,24.578) JOYSTICK.5@12.939,23.639 ; JOYSTICK.5@12.55,23.25 12.55,31.55 R7.1@25,44 29.373,48.373 178.344,48.717 179.844,48.373 278.446,48.373 282.662,52.589 282.662,61.2 279.647,64.215 275.787,64.215 J3.12@271.032,68.97 ; R7.1@24.15,44 cw(c22.098,44) 23.549,42.549 cw(c25,41.098) R7.1@25,43.15 ; R7.1@24.45,44 cw(c23.122,44) 24.061,43.061 cw(c25,42.122) R7.1@25,43.45 ; R7.1@25,44.55 ccw(c25,45.878) 25.939,44.939 ccw(c26.878,44) R7.1@25.55,44 ; R7.1@25,44.85 ccw(c25,46.902) 26.451,45.451 ccw(c27.902,44) R7.1@25.85,44 ; J3.12@271.032,68.12 cw(c271.032,66.068) 272.483,67.519 cw(c273.934,68.97) J3.12@271.882,68.97 ; J3.12@271.032,68.42 cw(c271.032,67.092) 271.971,68.031 cw(c272.91,68.97) J3.12@271.582,68.97
JOY_XAXIS: JOYSTICK.2X MUX3.5 | length 102
  Top Layer w0.3: JOYSTICK.2X@20,10.9 cw(c20,8.848) 21.451,10.299 cw(c22.902,11.75) JOYSTICK.2X@20.85,11.75 ; JOYSTICK.2X@20,11.2 cw(c20,9.872) 20.939,10.811 cw(c21.878,11.75) JOYSTICK.2X@20.55,11.75 ; JOYSTICK.2X@20,11.75 21.756,9.994 29.78,9.994 32.802,13.016 32.802,35.444 52.31,54.952 70.032,54.952 MUX3.5@76.27,61.19 ; MUX3.5@75.42,61.19 cw(c73.368,61.19) 74.819,59.739 cw(c76.27,58.288) MUX3.5@76.27,60.34 ; MUX3.5@75.72,61.19 cw(c74.392,61.19) 75.331,60.251 cw(c76.27,59.312) MUX3.5@76.27,60.64
JOY_YAXIS: JOYSTICK.2Y MUX3.2 | length 76.1
  Top Layer w0.3: JOYSTICK.2Y@28.25,20 30.974,22.724 30.974,36.333 52.31,57.669 65.129,57.669 MUX3.2@68.65,61.19 ; JOYSTICK.2Y@28.25,20.55 ccw(c28.25,21.878) 29.189,20.939 ccw(c30.128,20) JOYSTICK.2Y@28.8,20 ; JOYSTICK.2Y@28.25,20.85 ccw(c28.25,22.902) 29.701,21.451 ccw(c31.152,20) JOYSTICK.2Y@29.1,20 ; MUX3.2@67.8,61.19 cw(c65.748,61.19) 67.199,59.739 cw(c68.65,58.288) MUX3.2@68.65,60.34 ; MUX3.2@68.1,61.19 cw(c66.772,61.19) 67.711,60.251 cw(c68.65,59.312) MUX3.2@68.65,60.64
KEY1: KEY1.2 MUX4.13 | length 102.5
  Top Layer w0.3: KEY1.2@49.5,16.25 58.964,25.714 58.964,31.076 68.337,40.448 72.096,40.448 73.798,42.15 73.798,43.725 95.515,65.442 107.862,65.442 MUX4.13@111.23,68.81 ; KEY1.2@49.5,16.8 ccw(c49.5,18.128) 50.439,17.189 ccw(c51.378,16.25) KEY1.2@50.05,16.25 ; KEY1.2@49.5,17.1 ccw(c49.5,19.152) 50.951,17.701 ccw(c52.402,16.25) KEY1.2@50.35,16.25 ; KEY1.2@49.5,17.4 ccw(c49.5,20.176) 51.463,18.213 ccw(c53.426,16.25) KEY1.2@50.65,16.25 ; MUX4.13@110.38,68.81 cw(c108.328,68.81) 109.779,67.359 cw(c111.23,65.908) MUX4.13@111.23,67.96 ; MUX4.13@110.68,68.81 cw(c109.352,68.81) 110.291,67.871 cw(c111.23,66.932) MUX4.13@111.23,68.26